# EAGLE board ecgdesign4 (EAGLE 9.3.0)
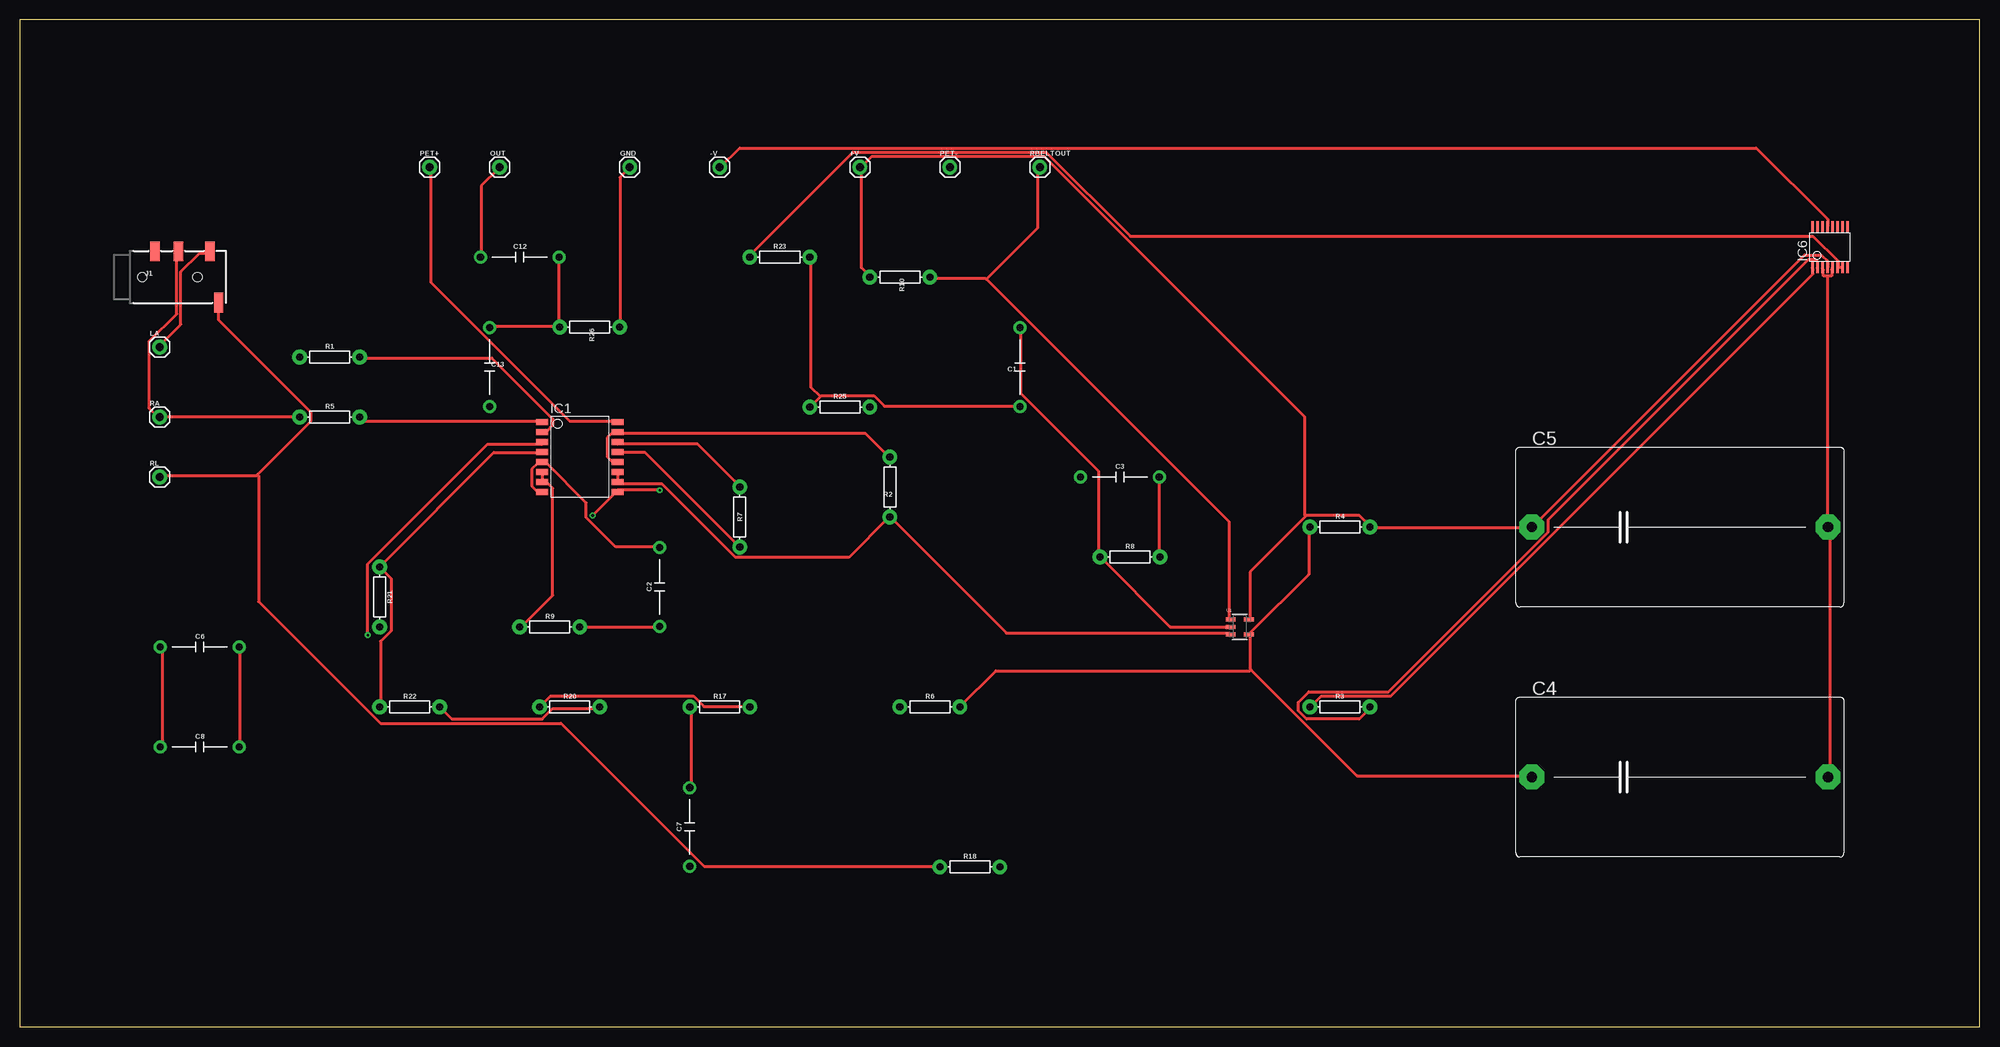
[diagram p0: board, top side]
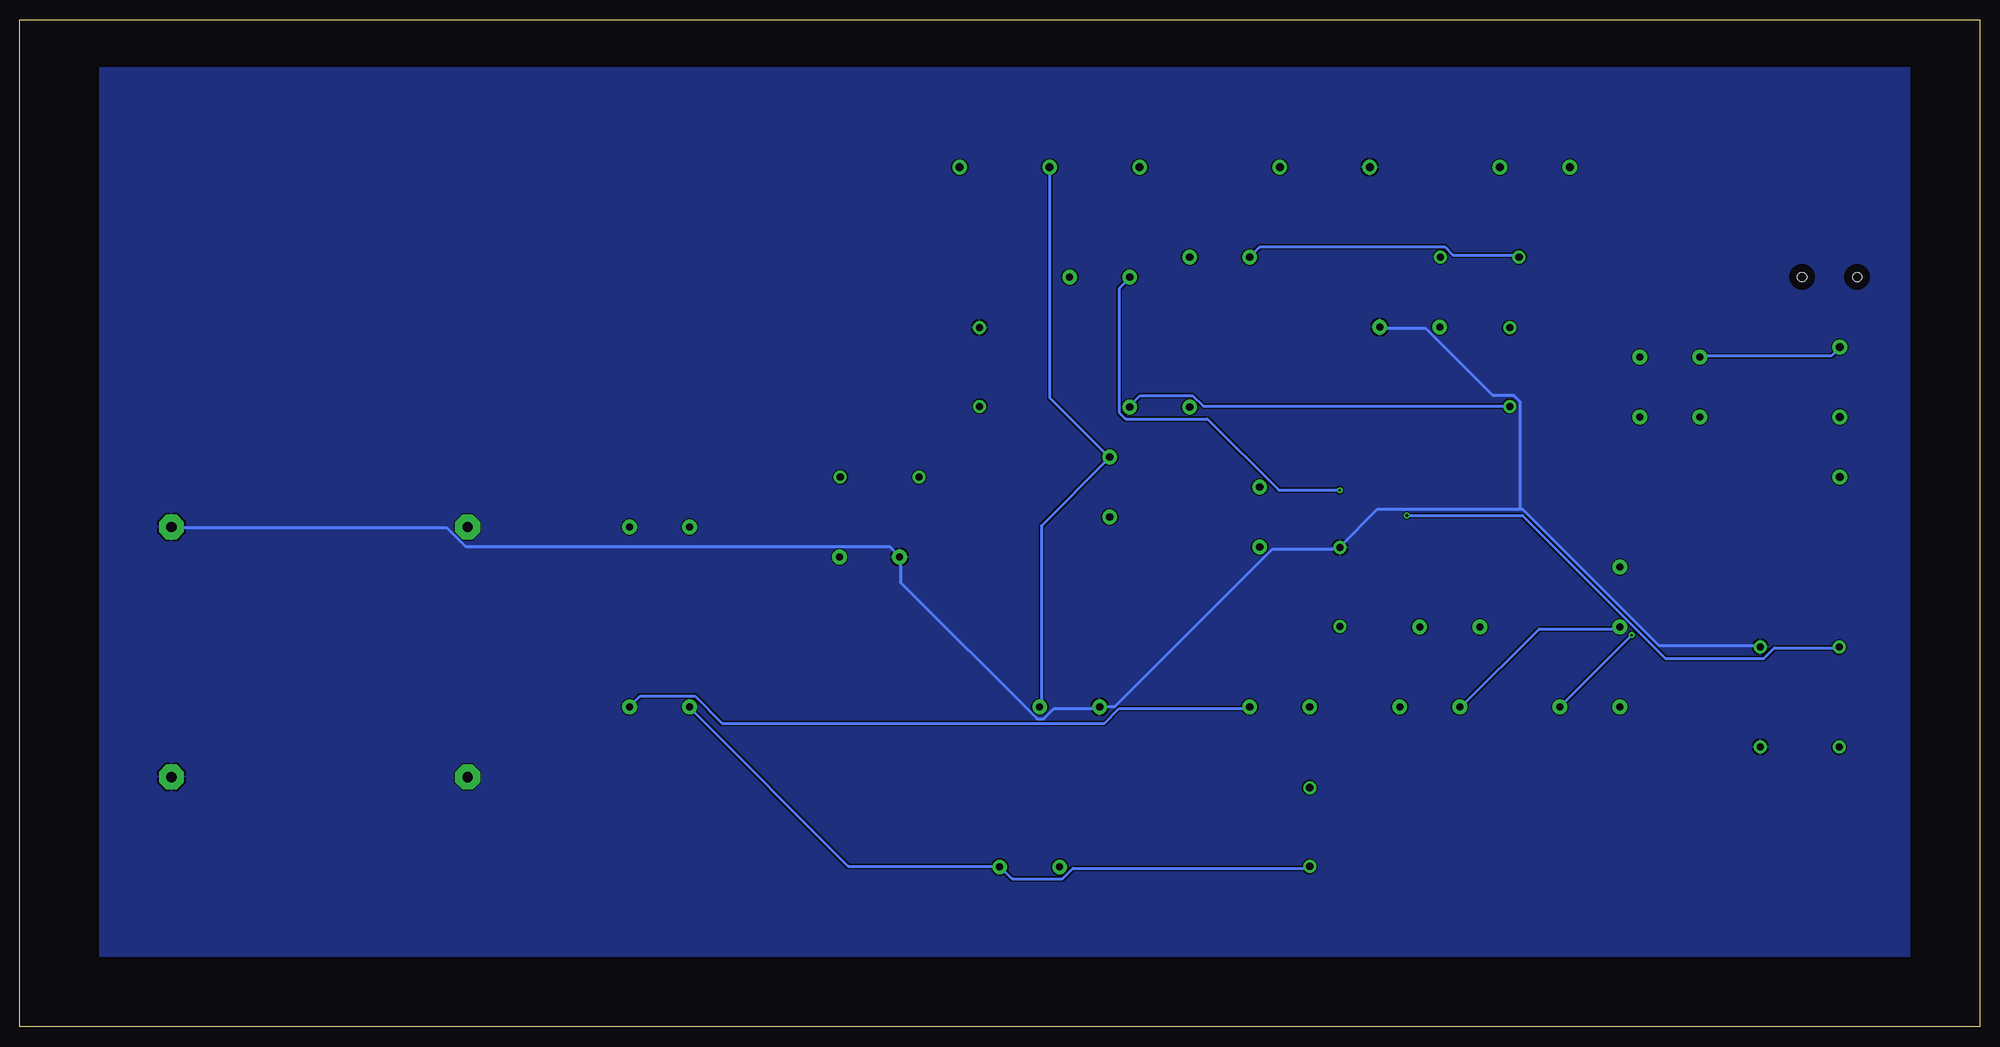
[diagram p1: board, bottom side, seen from below]

Size 248.9 x 127.94 mm. Coordinates in mm from the lower left corner, seen from the top.
Outline: 0,0 248.9,0 248.9,127.94 0,127.94 0,0
Copper layers (1*16): Top 0.035mm / dielectric 1.5mm / Bottom 0.035mm
Design rules "default": minimum track width 6mil, minimum drill 0.35mm, track to track 6mil, track to pad 6mil, pad to pad 6mil, via to via 6mil, smd to smd 6mil, copper to edge 40mil, drill to drill 6mil, minimum pad ring 10mil, minimum via ring 8mil, stop-mask expansion 4mil, vias tented up to drill 0mil, thermal gap 10mil
Net classes: 0 default: width 0.381 mm, drill 0.076 mm

## Footprints (pad centres in the part's own frame; a part is rotated, then mirrored left to right if it is on the bottom)
1X01 = drill 1.016 pad 1.88: 1 0,0
CAP-PTH-10MM = drill 0.9 pad 1.651: 1 -5,0; 2 5,0
C37.5B20 = drill 1.321 pad 3.15 octagon: 1 -18.796,0; 2 18.796,0
SO16-1 = smd 0.762 x 1.524: 1 -4.445,-4.775; 2 -3.175,-4.775; 3 -1.905,-4.775; 4 -0.635,-4.775; 5 0.635,-4.775; 6 1.905,-4.775; 7 3.175,-4.775; 8 4.445,-4.775; 9 4.445,4.775; 10 3.175,4.775; 11 1.905,4.775; 12 0.635,4.775; 13 -0.635,4.775; 14 -1.905,4.775; 15 -3.175,4.775; 16 -4.445,4.775
SSOP16BU = smd 0.348 x 1.397: 1 -2.223,-2.619; 2 -1.588,-2.62; 3 -0.953,-2.62; 4 -0.318,-2.62; 5 0.318,-2.62; 6 0.953,-2.62; 7 1.588,-2.62; 8 2.223,-2.62; 9 2.223,2.62; 10 1.588,2.62; 11 0.953,2.62; 12 0.318,2.62; 13 -0.318,2.62; 14 -0.953,2.62; 15 -1.588,2.62; 16 -2.223,2.62
AUDIO_JACK_3.5MM_TRRS_SMD_RA = smd 1.2 x 2.5: EARTH 11.3,-3.25; RING1 6.2,3.25; RING2 3.2,3.25; TIP 10.2,3.25 | hole 1.2: 1.6,0; 8.6,0
AXIAL-0.3 = drill 0.9 pad 1.88: P$1 -3.81,0; P$2 3.81,0
SOT-5_S = smd 1.211 x 0.501: 1 -1.15,0.95; 2 -1.15,0; 3 -1.15,-0.95; 4 1.15,-0.95; 5 1.15,0.95

## Placement (x,y rotation side)
+V  [1X01]  106.68,109.22 0 top
-V  [1X01]  88.9,109.22 0 top
C1  10nF  [CAP-PTH-10MM]  127,83.82 90 top
C2  10nF  [CAP-PTH-10MM]  81.28,55.88 90 top
C3  10nF  [CAP-PTH-10MM]  139.7,69.85 0 top
C4  20u  [C37.5B20]  210.82,31.75 0 top
C5  20u  [C37.5B20]  210.82,63.5 0 top
C6  10uF  [CAP-PTH-10MM]  22.86,48.26 0 top
C7  0.1uF  [CAP-PTH-10MM]  85.09,25.4 90 top
C8  0.1uF  [CAP-PTH-10MM]  22.86,35.56 0 top
C12  5nF  [CAP-PTH-10MM]  63.5,97.79 0 top
C13  5nF  [CAP-PTH-10MM]  59.69,83.82 270 top
GND  [1X01]  77.47,109.22 0 top
IC1  INA2128U  [SO16-1]  71.12,72.39 270 top
IC6  [SSOP16BU]  229.87,99.06 0 top
J1  AUDIO_JACK_TRRSSMD_RA  [AUDIO_JACK_3.5MM_TRRS_SMD_RA]  13.97,95.25 0 top
LA  [1X01]  17.78,86.36 0 top
OUT  [1X01]  60.96,109.22 0 top
PET+  [1X01]  52.07,109.22 0 top
PET-  [1X01]  118.11,109.22 0 top
R1  220k  [AXIAL-0.3]  39.37,85.09 0 top
R2  100k  [AXIAL-0.3]  110.49,68.58 270 top
R3  1M  [AXIAL-0.3]  167.64,40.64 0 top
R4  10k  [AXIAL-0.3]  167.64,63.5 0 top
R5  220k  [AXIAL-0.3]  39.37,77.47 0 top
R6  10k  [AXIAL-0.3]  115.57,40.64 0 top
R7  1k  [AXIAL-0.3]  91.44,64.77 270 top
R8  1k  [AXIAL-0.3]  140.97,59.69 0 top
R9  1k  [AXIAL-0.3]  67.31,50.8 0 top
R10  20k  [AXIAL-0.3]  111.76,95.25 180 top
R17  10k  [AXIAL-0.3]  88.9,40.64 0 top
R18  220k  [AXIAL-0.3]  120.65,20.32 0 top
R20  22k  [AXIAL-0.3]  69.85,40.64 0 top
R21  22k  [AXIAL-0.3]  45.72,54.61 270 top
R22  25  [AXIAL-0.3]  49.53,40.64 0 top
R23  470k  [AXIAL-0.3]  96.52,97.79 0 top
R25  470k  [AXIAL-0.3]  104.14,78.74 0 top
R26  220k  [AXIAL-0.3]  72.39,88.9 180 top
RA  [1X01]  17.78,77.47 0 top
RBELTOUT  [1X01]  129.54,109.22 0 top
RL  [1X01]  17.78,69.85 0 top
U1  LT1716CS5TRPBF  [SOT-5_S]  154.94,50.8 0 top

## Library data of the parts
+V -V GND LA OUT PET+ PET- RA RBELTOUT RL = SparkFun-Connectors
C1-C3 C6-C8 C12 C13 = SparkFun-Capacitors; PROD_ID: CAP-09321
C4 C5 = capacitor-wima
IC1 = burr-brown; MF: TEXAS INSTRUMENTS; MPN: INA2128U; OC_FARNELL: 1212421; OC_NEWARK: 28C7388
IC6 = burr-brown; MF: TEXAS INSTRUMENTS; MPN: OPA4336EA/250; OC_FARNELL: 1207060; OC_NEWARK: 74K3911
J1 = SparkFun-Connectors; PROD_ID: CONN-10676; SF_ID: PRT-12639
R1-R7 R10 = SparkFun-Resistors; PROD_ID: RES-12183
R8 R9 = SparkFun-Resistors; PROD_ID: RES-12182
R17 R18 R20-R23 R25 R26 = SparkFun-Resistors; PROD_ID: RES-08380
U1 = LT1716CS5TRPBF; DESCRIPTION: LT1716 - SOT-23, 44V, Over-The-Top, Micropower, Precision Rail-to-Rail Comparator; DIGI-KEY_PART_NUMBER: LT1716CS5#TRPBFCT-ND; DIGI-KEY_PURCHASE_URL: https://www.digikey.com/product-detail/en/linear-technology-analog-devices/LT1716CS5-TRPBF/LT1716CS5-TRPBFCT-ND/7897918?utm_source=snapeda&utm_medium=aggregator&utm_campaign=symbol; MF: Linear Technology; MP: LT1716CS5#TRPBF; PACKAGE: TSOT-23 Linear Technology

## Nets
+V: +V.1 C5.1 C6.1 C8.1 IC1.9 IC6.4 R4.P$2 R10.P$2 U1.5
-V: -V.1 IC6.13
GND: C1.2 C2.2 C4.2 C5.2 C6.2 C8.2 GND.1 IC1.5 IC1.8 IC6.3 IC6.5 R6.P$1 R8.P$1 R26.P$1 U1.2
LAA: IC1.2 R1.P$2
N$1: IC1.14 R7.P$1
N$2: J1.TIP LA.1 R1.P$1
N$3: C7.2 R17.P$1
N$4: IC1.6 IC1.7 R9.P$1
N$5: C7.1 IC6.1 R3.P$1 R18.P$2
N$6: IC6.2 R3.P$2 R17.P$2 R20.P$1 R21.P$2
N$7: C12.2 C13.1 R26.P$2
N$8: IC1.4 R21.P$1 R22.P$1
N$9: C2.1 R9.P$2
N$10: IC1.1 R5.P$2
N$11: C3.2 R8.P$2
N$12: IC1.13 R7.P$2
N$13: IC1.10 IC1.11 R2.P$2 U1.3
N$14: C4.1 IC1.12 IC1.15 PET-.1 R2.P$1 R4.P$1 R6.P$2 U1.4
N$15: J1.EARTH R18.P$1 RL.1
N$16: C1.1 R23.P$2 R25.P$1
N$17: IC1.16 PET+.1
N$18: C13.2 R25.P$2
N$19: J1.RING1 R5.P$1 RA.1
N$22: R10.P$1 RBELTOUT.1 U1.1
N$23: IC1.3 R20.P$2 R22.P$2
OUT: C12.1 IC6.6 IC6.7 OUT.1 R23.P$1

## Tracks (layer width: path | path; a pad name or v marks a point on that pad's centre or on a via)
+V  (via drill 0.35)
  Top 0.381: 163.29,64.84 163.42,64.97 170.09,64.97 171.43,63.64 R4.P$2 171.69,63.37 191.96,63.37 C5.1 192.23,63.64 226.63,98.04 228.76,98.04 229.56,97.24 229.56,96.44 IC6.4 | 163.29,64.84 156.22,57.77 156.22,51.91 U1.5 | C8.1 18.07,35.64 18.07,48.17 C6.1 | v81.28,68.17 75.95,68.17 IC1.9 75.68,67.91 v72.75,64.97 | R10.P$2 107.95,95.38 106.88,96.44 106.88,108.98 +V.1 106.88,109.25 108.22,110.58 130.09,110.58 163.16,77.51 163.16,64.97 163.29,64.84
  Bottom 0.381: v81.28,68.17 89.01,68.17 98.08,77.24 108.48,77.24 109.28,78.04 109.28,93.78 107.95,95.11 R10.P$2 | v72.75,64.97 58.08,64.97 39.94,46.84 27.41,46.84 26.07,48.17 18.07,48.17 C6.1
-V
  Top 0.381: IC6.13 229.56,101.78 229.56,102.58 220.5,111.65 91.41,111.65 89.01,109.25 -V.1
GND
  Top 0.381: R26.P$1 76.21,88.98 76.21,107.91 77.28,108.98 GND.1 | C8.2 27.94,35.64 27.94,48.17 C6.2 | 66.34,71.64 65.81,71.64 65.01,70.84 65.01,68.71 65.55,68.17 66.34,68.17 IC1.8 | 66.34,71.64 66.88,71.64 71.94,66.57 71.94,64.71 75.68,60.97 81.28,60.97 C2.2 | 66.34,71.64 IC1.5 | 229.56,95.38 230.1,95.38 230.1,96.18 IC6.5 | 229.56,95.38 229.03,95.38 229.03,96.18 IC6.3 | 229.56,95.38 229.56,63.64 C5.2 229.83,63.37 229.83,31.9 C4.2 | U1.2 153.56,50.84 146.09,50.84 137.29,59.64 R8.P$1 137.02,59.91 137.02,70.57 127.15,80.44 127.15,88.71 C1.2
  Bottom 0.381: 58.34,65.77 76.48,65.77 81.28,60.97 C2.2 81.28,60.71 89.81,60.71 109.82,40.7 111.68,40.7 R6.P$1 111.95,40.44 117.55,40.44 118.89,39.1 119.69,39.1 137.02,56.44 137.02,59.64 R8.P$1 137.29,59.91 138.35,60.97 192.23,60.97 194.63,63.37 229.56,63.37 C5.2 | 58.34,65.77 58.08,65.77 40.74,48.44 27.94,48.44 C6.2 | 58.34,65.77 58.34,79.38 59.14,80.17 61.81,80.17 70.34,88.71 75.95,88.71 R26.P$1
  pour Bottom: 8.89,121.92 8.89,8.89 238.76,8.89 238.76,121.92
LAA
  Top 0.381: IC1.2 66.34,75.64 66.88,75.64 67.68,76.44 67.68,77.24 59.94,84.98 43.41,84.98 R1.P$2
N$1
  Top 0.381: IC1.14 75.95,74.04 86.08,74.04 91.41,68.71 R7.P$1
N$2
  Top 0.381: J1.TIP 23.94,98.31 22.87,98.31 20.47,95.91 20.47,89.24 17.8,86.58 LA.1
  Bottom 0.381: R1.P$1 35.41,85.24 18.87,85.24 17.8,86.31 LA.1
N$3
  Top 0.381: C7.2 85.28,30.57 85.28,40.44 R17.P$1
N$4
  Top 0.381: IC1.6 IC1.7 66.34,68.97 67.14,68.97 67.68,68.44 67.68,54.84 63.68,50.84 R9.P$1
N$5
  Top 0.381: IC6.1 227.7,96.18 227.7,95.64 174.09,42.04 165.29,42.04 163.96,40.7 R3.P$1
  Bottom 0.381: C7.1 85.28,20.17 115.15,20.17 116.48,18.83 122.89,18.83 124.22,20.17 R18.P$2 124.48,20.43 143.69,20.43 163.69,40.44 R3.P$1
N$6
  Top 0.381: R17.P$2 92.48,40.7 86.88,40.7 85.55,42.04 67.41,42.04 66.08,40.7 R20.P$1 | IC6.2 228.23,96.44 228.23,97.24 227.96,97.51 227.17,97.51 194.09,64.44 194.09,62.84 173.82,42.57 163.69,42.57 162.36,41.24 162.36,40.17 163.42,39.1 170.09,39.1 171.43,40.44 R3.P$2
  Bottom 0.381: R21.P$2 45.81,50.57 55.94,50.57 65.81,40.7 R20.P$1 | R17.P$2 92.75,40.44 109.28,40.44 111.15,38.57 159.69,38.57 163.16,42.04 170.09,42.04 171.43,40.7 R3.P$2
N$7
  Top 0.381: 68.48,88.98 59.94,88.98 C13.1 | 68.48,88.98 68.48,97.78 C12.2 | 68.48,88.98 R26.P$2
N$8
  Top 0.381: IC1.4 66.34,72.97 60.21,72.97 45.81,58.57 R21.P$1 45.81,58.31 47.14,56.97 47.14,50.3 45.81,48.97 45.81,40.7 R22.P$1
N$9
  Top 0.381: C2.1 81.28,50.84 71.14,50.84 R9.P$2
N$10
  Top 0.381: R5.P$2 43.67,76.98 66.34,76.98 IC1.1
N$11
  Top 0.381: C3.2 144.75,69.77 144.75,59.91 R8.P$2
N$12
  Top 0.381: IC1.13 75.95,72.97 79.41,72.97 91.41,60.97 R7.P$2
N$13
  Top 0.381: IC1.11 75.95,70.31 75.95,69.24 IC1.10 75.95,68.97 81.55,68.97 90.88,59.64 105.28,59.64 110.35,64.71 R2.P$2 110.62,64.71 125.28,50.04 153.56,50.04 U1.3
N$14
  Top 0.381: R4.P$1 163.69,63.37 163.69,57.51 156.22,50.04 U1.4 156.22,49.77 156.22,45.5 156.36,45.37 | 156.36,45.37 169.82,31.9 191.96,31.9 C4.1 | IC1.12 75.68,71.91 75.15,71.91 74.61,72.44 74.61,74.84 75.15,75.38 75.68,75.38 IC1.15 75.95,75.38 107.42,75.38 110.35,72.44 R2.P$1 | 156.36,45.37 156.22,45.24 123.95,45.24 119.42,40.7 R6.P$2
  Bottom 0.381: PET-.1 118.09,108.98 118.09,79.91 110.62,72.44 R2.P$1 110.62,72.17 119.15,63.64 119.15,40.7 R6.P$2
N$15
  Top 0.381: 30.21,70.17 30.07,70.04 17.8,70.04 RL.1 | 30.21,70.17 37.01,76.98 37.01,78.04 25.27,89.78 25.27,91.91 J1.EARTH | R18.P$1 116.75,20.43 86.88,20.43 68.75,38.57 45.81,38.57 30.34,54.04 30.34,70.04 30.21,70.17
N$16
  Top 0.381: 101.68,80.04 100.48,78.84 R25.P$1 | 101.68,80.04 101.82,80.17 108.48,80.17 109.82,78.84 126.89,78.84 C1.1 | 101.68,80.04 100.48,81.24 100.48,97.78 R23.P$2
N$17
  Top 0.381: IC1.16 75.68,76.98 69.81,76.98 52.21,94.58 52.21,108.98 PET+.1
N$18
  Bottom 0.381: C13.2 59.94,78.84 98.62,78.84 99.95,80.17 106.62,80.17 107.95,78.84 R25.P$2
N$19
  Top 0.381: J1.RING1 19.94,98.31 19.94,90.58 16.47,87.11 16.47,78.58 17.54,77.51 RA.1 17.8,77.51 35.41,77.51 R5.P$1
N$22
  Top 0.381: 122.75,94.98 122.62,95.11 115.68,95.11 R10.P$1 | 122.75,94.98 153.56,64.17 153.56,51.91 U1.1 | 122.75,94.98 129.29,101.51 129.29,108.98 RBELTOUT.1
N$23  (via drill 0.35)
  Top 0.381: v44.21,49.77 44.21,58.84 59.41,74.04 66.34,74.04 IC1.3 | R22.P$2 54.88,39.1 66.34,39.1 67.68,40.44 73.55,40.44 R20.P$2
  Bottom 0.381: R22.P$2 v44.21,49.77
OUT
  Top 0.381: C12.1 58.61,98.04 58.61,106.84 60.74,108.98 OUT.1 | 230.9,96.44 231.43,96.44 IC6.7 | 230.9,96.44 230.9,97.24 227.7,100.44 141.02,100.44 130.35,111.11 105.82,111.11 92.75,98.04 R23.P$1 | 230.9,96.44 IC6.6
  Bottom 0.381: C12.1 58.61,98.04 66.88,98.04 67.94,99.11 91.41,99.11 92.48,98.04 R23.P$1